# Altium PCB NANO PCB.PcbDoc
Units mm, origin at the board's own origin, x right, y up, seen from the top; angles counter-clockwise.
Board outline 45 x 18 mm, 2 copper layers (Top Layer, Bottom Layer); 28 components, 40 nets, 149 pads, 28 vias.
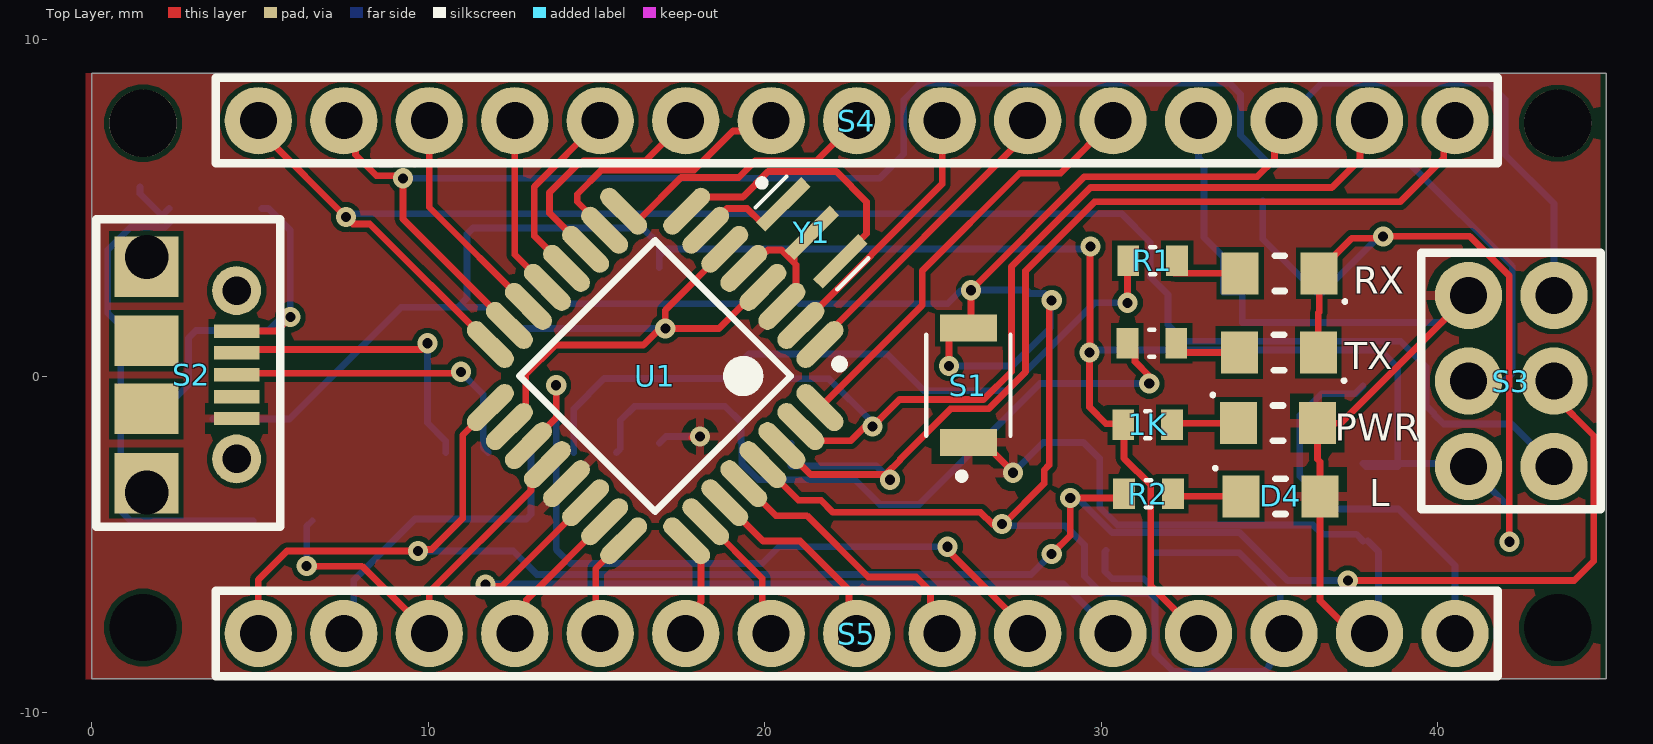
[diagram p0: Top Layer view]
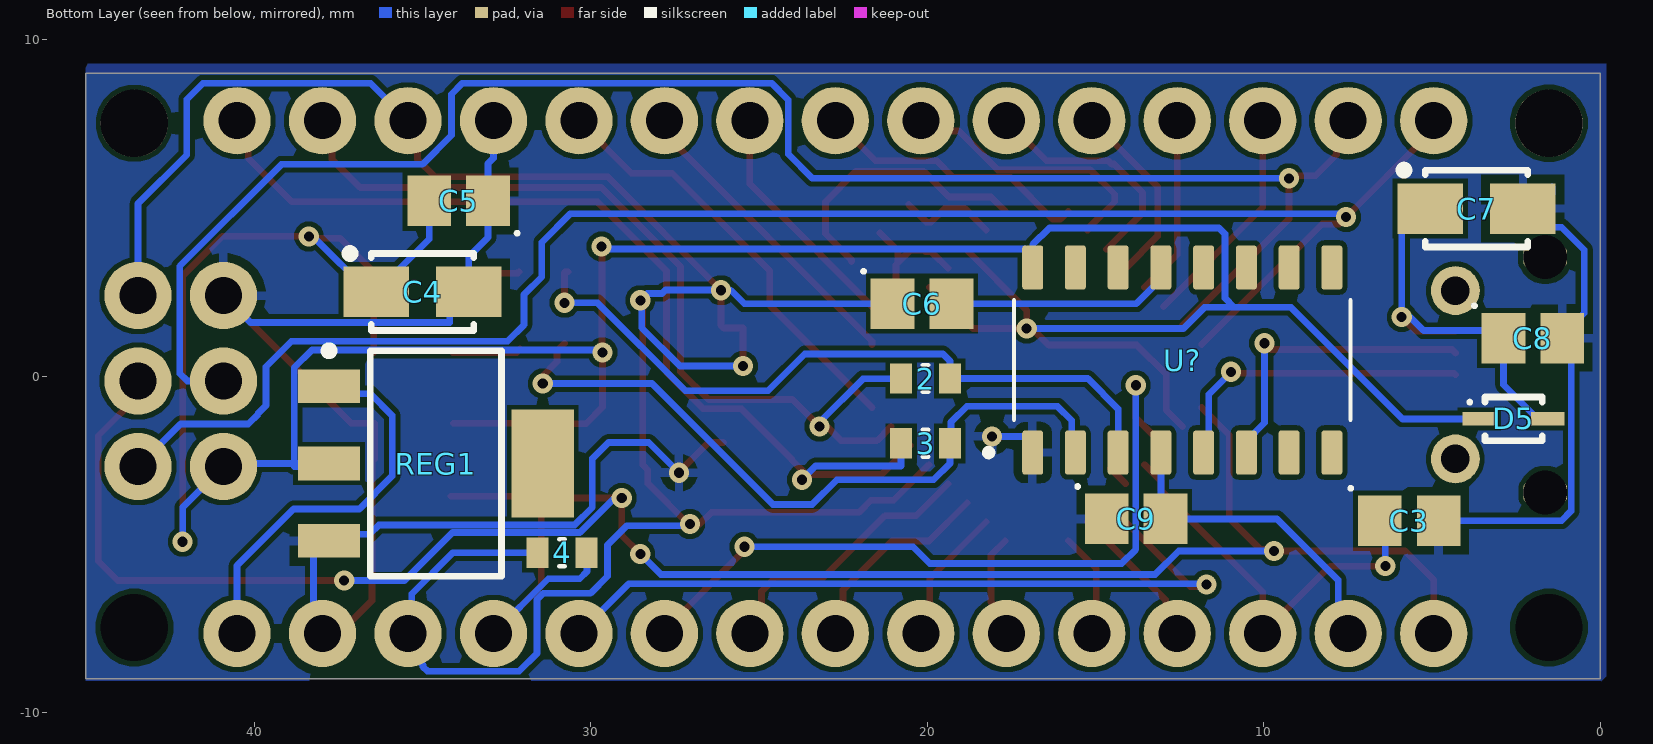
[diagram p1: Bottom Layer view, seen from below]

## Layer stack, top to bottom
Top Solder: solder mask 0.05, Solder Resist, Dk 3.5
Top Layer: signal copper 0.0356
Dielectric 1: dielectric 0.32, FR-4, Dk 4.8
Bottom Layer: signal copper 0.0356
Bottom Solder: solder mask 0.05, Solder Resist, Dk 3.5

## Board outline
0,-9 0,9 45,9 45,-9

## Design rules (kind name [scope] priority, off if disabled: settings)
Clearance [All] p1: gap=0.15 ignorepadtopadclearanceinfootprint=FALSE
HoleToHoleClearance [All] p1: gap=0 allowstackedmicrovias=TRUE
MinimumSolderMaskSliver [All] p1: minsoldermaskwidth=0
PolygonConnect [All] p1: connectstyle=Relief reliefconductorwidth=0.254 reliefentries=4 polygonreliefangle="90 Angle" airgapwidth=0.254
RoutingVias [All] p1: holewidth=0.6 width=1.27 viastyle="Through Hole" minholewidth=0.6 minwidth=1.27 maxholewidth=0.6 maxwidth=1.27
SilkToSilkClearance [All] p1: silktosilkclearance=0.1
SilkToSolderMaskClearance [IsPad] p1: minsilkscreentomaskgap=0 clearancetoexposedcopper=TRUE
SolderMaskExpansion [All] p1: expansion=0.05 istentingtop=FALSE
SupplyNets "Schematic Supply Nets_4" [InNet('+3V3')] p1: voltage=0.000
SupplyNets "Schematic Supply Nets_3" [InNet('VUSB')] p2: voltage=0.000
SupplyNets "Schematic Supply Nets_2" [InNet('VIN')] p3: voltage=0.000
SupplyNets "Schematic Supply Nets_1" [InNet('GND')] p4: voltage=0.000
SupplyNets "Schematic Supply Nets" [InNet('+5')] p5: voltage=0.000
Width Width_POW [(InNet('+3V3') AND InNet('+5') AND InNet('VIN') AND InNet('VUSB') AND InNet('GND'))] p1: maxlimit=0.6 minlimit=0.4 preferedwidth=0.4
Width [All] p2: maxlimit=0.3 minlimit=0.2 preferedwidth=0.2
26 further rules are at their usual default settings.

## Classes and differential pairs
component class Sheet1: 1K 2 3 4 C3 C4 C5 C6 C7 C8 C9 D5 R1 R2 REG1 rx S1 S2 S3 S4 S5 U1 Y1

## Components (designator, comment, footprint, x,y, rotation, side; value= is the part's Value field where it differs from the comment)
1K "ERA3AEB8870V" RES_ERA3AEB8870V 31.375,-1.45 r180 top
2 "1K" RES_ERA3AEB8870V 20.05,-0.075 r180 bottom
3 "1K" RES_ERA3AEB8870V 20.05,-2 r180 bottom
4 "1K" RES_ERA3AEB8870V 30.85,-5.25 r0 bottom
C3 "100nF Ceramic Multilayer Capacitor_1" CAPCP2012X09N 5.675,-4.3 r180 bottom
C4 "Capacitor SMT Tantalum" "CASE A - 3216X18" 34.996,2.497 r180 bottom value=4.7µF
C5 "100nF Ceramic Multilayer Capacitor_1" CAPCP2012X09N 33.923,5.206 r0 bottom
C6 "100nF Ceramic Multilayer Capacitor_1" CAPCP2012X09N 20.154,2.15 r180 bottom
C7 "Capacitor SMT Tantalum" "CASE A - 3216X18" 3.675,4.975 r180 bottom value=4.7µF
C8 "100nF Ceramic Multilayer Capacitor_1" CAPCP2012X09N 2,1.125 r180 bottom
C9 "100nF Ceramic Multilayer Capacitor_1" CAPCP2012X09N 13.792,-4.246 r180 bottom
D4 "L" LED1913X12NRED 35.325,-3.575 r0 top
D5 "Panasonic DB2J20900L Schottky Diode, 0.5A, 20V, 2.4ns, 2-Pin SMini2 F5 B" DIOM1712X07N 2.575,-1.275 r180 bottom
PWR "Kingbright Blue LED, 60 mcd 120 ° 0805" LED1913X12NBLUE 35.25,-1.4 r0 top (schematic designator D1)
R1 "1K" RES_ERA3AEB8870V 31.525,3.425 r0 top
R2 "1K" RES_ERA3AEB8870V 31.4,-3.5 r180 top
REG1 "LM1117MP-5.0/NOPB, Low Dropout Voltage Regulator, 1.5A, 5 V ±1%, 4-Pin SOT-223" SOT230P700X180-4N 34.6,-2.6 r180 bottom
RX "Kingbright Red LED, 100 mcd 120 ° 0805" LED1913X12NRED 35.3,3.05 r180 top (schematic designator D2)
S1 "B3U-1000P" SW_B3U-1000P 26.05,-0.275 r90 top
S2 "NewMolex Right Angle SMT Female Type B Micro USB Connector, 30 V ac, 1.8A" MicroUSB 4.303,1.267 r270 top
S3 "Programming Headers Dual Row" "ISP HEADER" 29.353,-20.343 r90 top
S4 "connector;str header;single row;.1 cont centers;.095 tail;gold or gtx;36 contact" Header 40.509,7.587 r180 top
S5 "connector;str header;single row;.1 cont centers;.095 tail;gold or gtx;36 contact" Header 40.509,-7.653 r180 top
TX "Kingbright Green LED, 70 mcd 120 ° 0805" LED1913X12NGREEN 35.275,0.7 r180 top (schematic designator D3)
U1 "ATMEGA328" TQFP80P900X900X120-32N 16.741,0 r225 top
U? "CH340C" SOIC127P600X180-16N 12.42,0.475 r90 bottom
Y1 "CSTCE16M3V53-R0" OSC_CSTCE16M3V53-R0 21.399,4.253 r315 top
? "ERA3AEB8870V" RES_ERA3AEB8870V 31.5,0.975 r180 top

## Footprints (in the part's own frame and the unit in brackets; to place one, negate y for a bottom-side part, rotate by r counter-clockwise, add the part's x,y. Pads: shape width x height; smd on the part's side, far side on the other; paste and mask are expansions set on the pad)
CAPCP2012X09N [mm] "Chip Capacitor, 2-Leads, Body 2.00x1.25mm, IPC Medium Density"
  rect 1.3x1.5 smd: 1(-0.875,0) 2(0.875,0)
  silkscreen extent -1.79,0.91 -1.69,1.01, body extent -1.05,-0.57 0.95,0.68, height 0.78
"CASE A - 3216X18" [mm] "Molded Capacitor, 2-Leads, Body 3.2x1.6mm, IPC Medium Density"
  rect 1.95x1.5 smd: 1(-1.375,0) 2(1.375,0)
  silkscreen extent -2.28,-1.14 1.52,1.27, body extent -1.52,-0.76 1.65,0.84, height 1.77
DIOM1712X07N [mm] "Molded Diode, 2-Leads, Body 1.70x1.25mm, IPC Medium Density"
  rect 1x0.4 smd: 1(-1.016,0) 2(1.016,0)
  silkscreen extent -1.35,-0.65 0.85,0.65, body extent -0.9,-0.45 0.9,0.45, height 0.8
Header [mm] "SIL Header"
  round 2 hole 1.1: 1(0,0) 2(2.54,0) 3(5.08,0) 4(7.62,0) 5(10.16,0) 6(12.7,0) 7(15.24,0) 8(17.78,0) 9(20.32,0) 10(22.86,0) 11(25.4,0) 12(27.94,0) 13(30.48,0) 14(33.02,0) 15(35.56,0)
  silkscreen extent -1.27,-1.27 36.83,1.27, body extent -1.33,-1.35 36.93,1.35, height 8.6
"ISP HEADER" [mm] "SIL Header for programming"
  round 2 hole 1.1: 1(17.653,-14.097) 2(17.653,-11.557) 3(20.193,-14.097) 4(20.193,-11.557) 5(22.733,-14.097) 6(22.733,-11.557)
  silkscreen extent 16.38,-15.49 24,-10.16, body extent 16.38,-15.37 24,-10.29, height 8
LED1913X12NBLUE [mm] "LED 2-Leads, Body 1.90x1.32mm, IPC Medium Density"
  rect 1.1x1.25 smd: 1(-1.175,0) 2(1.175,0)
  silkscreen extent -1.99,-0.52 0.15,0.89, body extent -1,-0.62 1.02,0.62, height 1.1
LED1913X12NGREEN [mm] "LED 2-Leads, Body 1.90x1.32mm, IPC Medium Density"
  rect 1.1x1.25 smd: 1(-1.175,0) 2(1.175,0)
  silkscreen extent -1.99,-0.53 0.15,0.89, body extent -1.01,-0.62 1.01,0.63, height 1.1
LED1913X12NRED [mm] "LED 2-Leads, Body 1.90x1.32mm, IPC Medium Density"
  rect 1.1x1.25 smd: 1(-1.175,0) 2(1.175,0)
  silkscreen extent -1.99,-0.52 0.15,0.89, body extent -1.02,-0.43 1.04,0.47, height 0.85
MicroUSB [mm] "MicroUSB  Molex 5Pin"
  rect 0.4x1.35 smd: 1(-0.07,0) 2(0.58,0) 3(1.23,0) 4(1.88,0) 5(2.53,0)
  rrect50% 0.6x1.3 hole 1.3: ""(-2.27,-2.667) ""(-2.27,-2.667) ""(4.73,-2.667)
  rect 1.8x1.9 smd: ""(-1.98,-2.678) ""(4.45,-2.678)
  round 1.45 hole 0.85: ""(-1.27,0) ""(3.73,0)
  rect 1.5x1.9 smd: ""(0.218,-2.678) ""(2.242,-2.678)
  silkscreen extent -3.39,-4.17 5.75,1.3, body extent -2.83,-5.32 5.37,0.11, height 2.68
OSC_CSTCE16M3V53-R0 [mm]
  rect 0.4x1.9 smd: 1(-1.2,0) 2(0,0) 3(1.2,0)
  silkscreen extent -2.2,-0.65 1.72,0.65, body extent -1.6,-0.65 1.6,0.65, height 1
RES_ERA3AEB8870V [mm]
  rect 0.65x0.9 smd: 1(-0.725,0) 2(0.725,0)
  silkscreen extent -0.08,-0.4 0.08,0.4
SOIC127P600X180-16N [mm]
  rrect25% 1.31x0.62 smd: 1(-2.75,4.445) 2(-2.75,3.175) 3(-2.75,1.905) 4(-2.75,0.635) 5(-2.75,-0.635) 6(-2.75,-1.905) 7(-2.75,-3.175) 8(-2.75,-4.445) 9(2.75,-4.445) 10(2.75,-3.175) 11(2.75,-1.905) 12(2.75,-0.635) 13(2.75,0.635) 14(2.75,1.905) 15(2.75,3.175) 16(2.75,4.445)
  silkscreen extent -2.85,-5 1.78,5.85, body extent -3,-5 3,5, height 1.8
SOT230P700X180-4N [mm] "SOT223, 4-Leads, Body 6.50x7.00mm (avg), Pitch 2.30mm, IPC Medium Density"
  rect 1.85x1 smd: 1(-3.175,2.3) 2(-3.175,0) 3(-3.175,-2.3)
  rect 1.85x3.2 smd: 4(3.175,0)
  silkscreen extent -3.3,-3.35 1.95,3.47, body extent -3.8,-3.12 3.29,3.38, height 1.65
SW_B3U-1000P [mm]
  rect 0.8x1.7 smd: 1(-1.7,0) 2(1.7,0)
  silkscreen extent -2.8,-1.25 1.5,1.25
TQFP80P900X900X120-32N [mm] "TQFP, 32-Leads, Body 7.00x7.00mm, Pitch 0.80mm, IPC Medium Density"
  oval 1.75x0.55 smd: 1(-4.125,2.8) 2(-4.125,2) 3(-4.125,1.2) 4(-4.125,0.4) 5(-4.125,-0.4) 6(-4.125,-1.2) 7(-4.125,-2) 8(-4.125,-2.8) 17(4.125,-2.8) 18(4.125,-2) 19(4.125,-1.2) 20(4.125,-0.4) 21(4.125,0.4) 22(4.125,1.2) 23(4.125,2) 24(4.125,2.8)
  oval 0.55x1.75 smd: 9(-2.8,-4.125) 10(-2,-4.125) 11(-1.2,-4.125) 12(-0.4,-4.125) 13(0.4,-4.125) 14(1.2,-4.125) 15(2,-4.125) 16(2.8,-4.125) 25(2.8,4.125) 26(2,4.125) 27(1.2,4.125) 28(0.4,4.125) 29(-0.4,4.125) 30(-1.2,4.125) 31(-2,4.125) 32(-2.8,4.125)
  silkscreen extent -4.25,-2.85 2.85,3.75, body extent -4.44,-4.5 4.56,4.5, height 1.6

## Part data
1K ?: Package=None, Availability=Unavailable, MP=ERA3AEB8870V, Price=None
2 3 4 R1 R2: library part ERA3AEB8870V, Package=None, Availability=Unavailable, MP=ERA3AEB8870V, Price=None
C3 C5 C6 C8 C9: "AVX 0805 Standard 100nF Ceramic Multilayer Capacitor, 50 V dc X7R Dielectric ±10% SMD", Capacitance=100nF, Manufacturer=AVX, Package=0805, Voltage=50V, Creator="Ritesh Kanjee", Datasheet URL=http://za.rs-online.com/web/p/ceramic-multilayer-capacitors/4646688/, Date Created="18 February 2015", RS Stock No.=464-6688
C4 C7: library part "4.7µF Tant RS 496-3545", "Capacitor,tantalum,SMT,16V,4.7uF,10%,A-case", Package=3216-18, Tolerance=10%, Voltage=16V, ComponentLink1Description="Supplier Website", ComponentLink1URL=http://za.rs-online.com/web/search/searchBrowseAction.html?method=getProduct&R=4963545, ComponentLink2Description="RS Data sheet", ComponentLink2URL=http://docs-europe.origin.electrocomponents.com/webdocs/04ed/0900766b804ed4cc.pdf, LatestRevisionDate=28-April-2010, Part Originator="H Theron", Publisher=DPSS, RS Stock Nr.=496-3545
D4: library part "Kingbright Red LED, 100 mcd 120 ° 0805", "Kingbright Red LED, 100 mcd 120 ° 0805", Color=RED, Forward Voltage=1.85V, Manufacturer=KingBright, Manufacturer Part No.=KP-2012SRC-PRV, Creator="Ritesh Kanjee", Datasheet URL=http://za.rs-online.com/web/p/visible-leds/4663813/, Date Created="18 February 2015", RS Stock No.=466-3813
D5: library part "Schottky Diode, 0.5A, 20V, 2.4ns, 2-Pin SMini2 F5 B", Manufacturer=Panasonic, Manufacturer Part No.=DB2J20900L, Maximum Continuous Forward Current=0.5A, Peak Reverse Repetitive Voltage=20V, Created By="R Kanjee", Datasheet=http://docs-europe.electrocomponents.com/webdocs/1398/0900766b813986b3.pdf, Date Created="1 March 2015", RS Stock No.=713-2703
PWR: Color=Blue, Forward Voltage=3.2V, Manufacturer=KingBright, Manufacturer Part No.=KP-2012PBC-A, Creator="Ritesh Kanjee", Datasheet URL=http://za.rs-online.com/web/p/visible-leds/4663784/, Date Created="18 February 2015", RS Stock No.=466-3784
REG1: library part LM1117MP-5.0, Manufacturer="Texas Instruments", Maximum Input Voltage=15V, Output Voltage=5V, Supply Current=1.5Amps, Created By="R Kanjee", Datasheet URL=http://za.rs-online.com/web/p/low-dropout-voltage-regulators/5339583/, Date Created="26 February 2015", RS Stock No.=533-9583
RX: Color=RED/RX, Forward Voltage=1.85V, Manufacturer=KingBright, Manufacturer Part No.=KP-2012SRC-PRV, Creator="Ritesh Kanjee", Datasheet URL=http://za.rs-online.com/web/p/visible-leds/4663813/, Date Created="18 February 2015", RS Stock No.=466-3813
S1: "Switch Tactile N.O. SPST Round Button Gull Wing 0.05A 12VDC 1.5N SMD Embossed T/R", Package=None, Availability=Unavailable, MP=B3U-1000P, Price=None
S2: library part "Micro USB Connector, 30 V ac, 1.8A", Manufacturer=Molex, Manufacturer Part No.=105017-0001, Max Current=1.8A, Max Voltage=30V, Creator="R Kanjee", Datasheet URL=http://za.rs-online.com/web/p/micro-usb-connectors/8486764/, Date Created="28 February 2015", RS Stock No=848-6764
S3: library part "Programming ISP, Programming Headers Dual Row", Current Rating="3Amps Continuous", Manufacturer=FCI, Manufacturer Part No.=68000-236HLF, Created By="R Kanjee", Date Created="1 March 2015", RS Stock No.=2509565626
S4 S5: library part "Single row; PCB headers", Current Rating="3Amps Continuous", Manufacturer=FCI, Manufacturer Part No.=68000-236HLF, Created By="R Kanjee", Date Created="1 March 2015", RS Stock No.=2509565626
TX: Color=Green/TX, Forward Voltage="2.1 V", Manufacturer=KingBright, Manufacturer Part No.=KP-2012MGC, Creator="Ritesh Kanjee", Datasheet URL=http://za.rs-online.com/web/p/visible-leds/4663778/, Date Created="18 February 2015", RS Stock No.=466-3778
U1: library part ATMEGA328P-AU, "ATMEGA328P-AU, 8 bit AVR Microcontroller 20MHz 1 kB, 32 kB Flash, 2 kB RAM, I2C 32-Pin TQFP", Company="Lumina Inova", Created By="Ritesh Kanjee", Datasheet URL=http://docs-europe.electrocomponents.com/webdocs/0db4/0900766b80db4deb.pdf, Date Created="14 February 2015", RS Stock No.=696-3092
U?: "USB to serial chip CH340", Package=None, Availability="Not in stock", Check_prices=https://www.snapeda.com/parts/CH340C/WCH/view-part/?ref=eda, MF=WCH, MP=CH340C, Price=None, SnapEDA_Link=https://www.snapeda.com/parts/CH340C/WCH/view-part/?ref=snap
Y1: "Resonators RECOMMENDED ALT 81-CSTNE16M3V530000R", Package="SMD-3 Murata", Check_prices=https://www.snapeda.com/parts/CSTCE16M3V53-R0/Murata/view-part/?ref=eda, MF=Murata, MP=CSTCE16M3V53-R0, SnapEDA_Link=https://www.snapeda.com/parts/CSTCE16M3V53-R0/Murata/view-part/?ref=snap

## Free pads (board coordinates)
  round 1.524 hole 2: ""(1.524,-7.476) ""(43.561,-7.476)
  round 2 hole 2: ""(1.524,7.51) ""(43.561,7.51)

## Via types
v1: diameter 0.6, hole 0.3, Top Layer to Bottom Layer, 28 vias

## Nets (pads, with @x,y where several pads share a name; then routed paths per layer and width w, separated by ;. In a path a pad name is that pad's centre, name@x,y a point inside that pad or via, vN(x,y) a via of type N, cw(c..) or ccw(c..) an arc to the next point about the centre after c; other vN are vias at no path point)
+3V3: C9.2 S5.14 U?.4 | length 9.6
  Bottom Layer w0.2: S5.14 7.787,-7.355 7.787,-6.063 9.604,-4.246 C9.2 13.055,-4.108 U?.4
+5: 1K.2 4.1 C4.1 C5.2 D5.1 REG1.2 RX.1 S3.2 S5.4 TX.1 U1.4 U1.6 U1.18 U?.16 | length 109.6
  Top Layer w0.2: U1.18 12.893,-1.019 12.893,0.043 13.775,0.925 16.391,0.925 16.88,1.414 v1(17.043,1.414) ; U1.6 18.809,3.724 17.043,1.958 v1(17.043,1.414) ; U1.4 19.861,2.634 18.641,1.414 v1(17.043,1.414) ; v1(29.675,3.85) 29.663,3.838 29.663,0.713 v1(29.65,0.7) 29.65,-0.925 30.142,-1.417 30.617,-1.417 1K.2 ; 1K.2@30.675,-1.4 30.675,-2.447 31.471,-3.242 31.471,-6.234 S5.4 ; TX.1 36.45,1.871 36.475,1.896 36.475,3.125 37.44,4.09 38.315,4.09 v1(38.375,4.15) 40.952,4.15 42.125,2.977 v1(42.125,-4.925)
  Bottom Layer w0.2: D5.1 5.875,-1.275 9.192,2.042 10.879,2.042 ; U?.16 U?.16@16.865,3.541 ; v1(17.043,1.414) 12.385,1.414 11.757,2.042 10.879,2.042 ; v1(29.65,0.7) 29.725,0.775 38.282,0.775 38.811,0.246 38.811,-2.6 ; v1(29.675,3.85) 29.601,3.776 17.075,3.776 16.865,3.566 U?.16@16.865,3.541 ; 4.1@30.15,-5.175 30.108,-5.217 30.108,-5.808 30.325,-6.025 31.261,-6.025 S5.4 ; C5.2 34.798,4.07 C4.1 36.596,2.497 38.249,4.15 v1(38.375,4.15) ; 38.811,-2.69 37.865,-2.69 REG1.2 38.811,-2.6 ; v1(42.125,-4.925) 42.125,-3.905 S3.2 40.488,-2.69 40.488,-2.6 38.811,-2.6 ; 10.879,2.042 11.15,2.313 11.15,4.225 11.325,4.4 16.368,4.4 16.865,3.903 U?.16@16.865,3.541
A0: S5.12 U1.23 | length 4.4
  Top Layer w0.2: S5.12 12.914,-7.309 12.914,-6.655 U1.23
A1: S5.11 U1.24 | length 3.2
  Top Layer w0.2: S5.11 14.975,-7.519 14.975,-5.726 U1.24
A2: S5.10 U1.25 | length 3.1
  Top Layer w0.2: S5.10 17.649,-7.166 18.102,-6.713 18.102,-5.321 U1.25
A3: S5.9 U1.26 | length 4.1
  Top Layer w0.2: U1.26 19.925,-6.012 19.925,-7.389 S5.9
A4/SDA: S5.8 U1.27 | length 6.2
  Top Layer w0.2: U1.27 19.944,-4.9 21.05,-4.9 22.503,-6.353 22.503,-7.427 S5.8
A5/SCL: S5.7 U1.28 | length 8.3
  Top Layer w0.2: U1.28 20.326,-4.15 21.25,-4.15 23.075,-5.975 24.5,-5.975 24.925,-6.4 24.925,-7.309 S5.7
A6: S5.6 U1.19 | length 22.6
  Top Layer w0.2: U1.19 13.8,-1.244 v1(13.8,-0.275) ; v1(25.425,-5.075) 25.425,-5.172 27.809,-7.556 S5.6
  Bottom Layer w0.2: v1(13.8,-0.275) 13.8,-5.15 14.221,-5.571 19.923,-5.571 20.369,-5.125 20.419,-5.075 v1(25.425,-5.075)
A7: S5.5 U1.22 | length 23.3
  Top Layer w0.2: v1(11.7,-6.2) 11.755,-6.255 12.183,-6.255 12.442,-5.995 U1.22
  Bottom Layer w0.2: v1(11.7,-6.2) 11.725,-6.175 28.871,-6.175 S5.5
AREF: C3.1 S5.13 U1.20 | length 12.2
  Top Layer w0.2: v1(6.386,-5.65) 8.026,-5.65 9.706,-7.329 S5.13@10.029,-7.329 ; S5.13 S5.13@10.029,-7.329 ; U1.20 13.05,-3.125 13.05,-3.4 10.029,-6.421 S5.13@10.029,-7.329
  Bottom Layer w0.2: v1(6.386,-5.65) 6.386,-4.464 C3.1
D0/RX: 3.1 S4.1 U1.30 | length 32.7
  Top Layer w0.2: U1.30 21.363,-2.925 ; 23.077,-2.924 22.777,-2.924 22.775,-2.925 21.363,-2.925 ; v1(23.724,-3.082) v1@23.567,-2.925 ; S4.1 40.179,7.257 40.179,6.479 38.875,5.175 29.8,5.175 27.75,3.125 27.75,0.125 26.65,-0.975 25.517,-0.975 24.028,-2.464 24.028,-2.488 23.591,-2.925 v1@23.567,-2.925 ; 21.363,-2.925 22.777,-2.925 23.077,-2.925 v1@23.567,-2.925
  Bottom Layer w0.2: 3.1 20.775,-2.675 23.317,-2.675 v1(23.724,-3.082)
D1/TX: 2.1 S4.2 U1.31 | length 26.4
  Top Layer w0.2: U1.31 21.496,-1.927 22.548,-1.927 22.974,-1.5 v1(23.2,-1.5) 24,-0.7 26.5,-0.7 27.327,0.127 27.327,3.252 29.675,5.6 36.85,5.6 37.684,6.434 37.684,7.302 S4.2
  Bottom Layer w0.2: 2.1 20.785,-0.085 21.91,-0.085 23.2,-1.375 v1(23.2,-1.5)
D2: S4.5 U1.32 | length 12.8
  Top Layer w0.2: U1.32 24.675,2.101 24.675,3.125 27.575,6.025 28.787,6.025 S4.5@30.349,7.587
D3: S4.6 U1.1 | length 9.2
  Top Layer w0.2: U1.1 21.638,1.032 27.809,7.203 S4.6
D4: S4.7 U1.2 | length 7.8
  Top Layer w0.2: U1.2 25.269,5.7 S4.7
D5: S4.8 U1.9 | length 8.2
  Top Layer w0.2: U1.9 16.043,4.658 16.272,4.658 17.514,5.9 19.225,5.9 19.725,6.4 21.542,6.4 S4.8
D6: S4.9 U1.10 | length 8.1
  Top Layer w0.2: U1.10 15.238,4.366 14.425,5.18 14.425,5.4 15.15,6.125 17.9,6.125 19.056,7.281 19.884,7.281 S4.9
D7: S4.10 U1.11 | length 7.1
  Top Layer w0.2: U1.11 13.6,4.838 13.6,5.45 14.45,6.3 14.525,6.3 14.625,6.4 16.462,6.4 S4.10
D8: S4.11 U1.12 | length 5.6
  Top Layer w0.2: U1.12 13.15,4.157 13.15,5.628 S4.11
D9: S4.12 U1.13 | length 5.4
  Top Layer w0.2: S4.12 12.569,3.606 U1.13
D10: S4.13 U1.14 | length 6.7
  Top Layer w0.2: S4.13 10.029,5.015 U1.14
D11/MOSI: S3.4 S4.14 U1.15 | length 51.2
  Top Layer w0.2: S4.14 7.834,7.243 7.834,6.574 8.456,5.952 9.173,5.952 v1(9.25,5.875) 9.25,4.663 U1.15
  Bottom Layer w0.2: v1(9.25,5.875) 23.409,5.875 24.13,6.596 24.13,8.205 24.629,8.704 33.807,8.704 34.138,8.374 34.138,7.154 35.001,6.291 39.184,6.291 42.21,3.265 42.21,0.074 41.986,-0.15 S3.4
D12/MISO: S3.1 S4.15 U1.16 | length 50.7
  Top Layer w0.2: S4.15 4.949,7.326 7.755,4.52 8.261,4.52 U1.16
  Bottom Layer w0.2: v1(7.55,4.725) 7.65,4.825 30.6,4.825 31.45,3.975 31.45,2.95 31.979,2.421 31.979,1.521 32.467,1.033 38.892,1.033 39.65,0.275 39.65,-0.875 39.875,-1.1 39.875,-1.124 40.176,-1.425 42.185,-1.425 S3.1
D13/SCK: R2.2 S3.3 S5.15 U1.17 | length 57.7
  Top Layer w0.2: S5.15 4.949,-6.051 5.8,-5.2 v1(9.695,-5.2) 9.739,-5.156 10.099,-5.156 11.02,-4.236 11.02,-1.761 U1.17 ; v1(28.524,-5.292) 29.075,-4.741 v1(29.075,-3.625) 30.665,-3.625 30.675,-3.615 R2.2 ; v1(37.325,-6.075) 44.055,-6.075 44.633,-5.497 44.633,-1.775 43.45,-0.592 S3.3
  Bottom Layer w0.2: v1(9.695,-5.2) 12.525,-5.2 13.225,-5.9 27.916,-5.9 v1(28.524,-5.292) ; v1(29.075,-3.625) 29.296,-3.625 30.321,-4.65 34.106,-4.65 35.531,-6.075 v1(37.325,-6.075)
GND: C3.2 C4.2 C5.1 C7.2 C8.2 C9.1 D4.2 PWR.2 REG1.3 S1.1 S2.5 S3.6 S4.4 S5.2 U1.3 U1.5 U1.21 U?.1 Y1.2 | length 69.5
  Top Layer w0.2: U1.21 U1.21@14.558,-2.749 ; v1@17.828,-1.832 17.86,-1.8 v1(18.075,-1.8) ; U1.5 19.866,3.691 20.041,3.691 20.091,3.741 20.494,3.741 20.93,3.306 ; U1.3 20.506,2.278 20.93,2.278 20.93,3.306 ; Y1.2 20.868,3.722 20.868,3.367 20.93,3.306 ; S1.1 26.5,-1.975 27.375,-2.85 v1(27.375,-2.875) ; S5.2 37.482,-7.653 37.009,-7.179 37.004,-7.179 36.5,-6.675 D4.2 36.5,-2.548 36.425,-2.473 PWR.2 37.12,-1.4 S3.6
  Bottom Layer w0.2: C7.2@1.434,5.616 1.434,5.416 C7.2@2.088,4.762 ; C7.2 C7.2@2.088,4.762 ; C3.2 1.15,-4.3 0.864,-4.014 C8.2@0.864,1.125 ; U?.1@16.865,-1.996 17.061,-1.8 v1(18.075,-1.8) ; v1@27.243,-2.875 v1(27.375,-2.875) 28.275,-1.975 29.473,-1.975 29.95,-2.452 29.95,-3.9 30.475,-4.425 36.296,-4.425 36.571,-4.7 37.575,-4.7 REG1.3 ; S4.4 32.889,6.475 33.048,6.316 C5.1 33.048,4.12 33.621,3.548 C4.2 34.188,2.497 34.188,1.592 40.112,1.592 S3.6 ; REG1.3@37.921,-4.9 38.237,-5.215 38.237,-7.386 S5.2 ; C8.2@0.864,1.125 C8.2@0.864,1.386 ; C8.2@0.864,1.125 C8.2 ; C8.2@0.864,1.386 0.812,1.438 0.812,1.538 0.475,1.875 0.475,3.75 1.142,4.417 C7.2@1.742,4.417 ; C8.2@0.864,1.386 C8.2 ; C8.2@0.864,1.386 0.864,1.49 1.125,1.49 C8.2 ; C7.2@1.742,4.417 2.167,4.417 2.3,4.55 C7.2@2.088,4.762 ; C7.2@1.742,4.417 C7.2@2.088,4.762
Net1K_1: 1K.1 PWR.1 | length 2
  Top Layer w0.2: 1K.1@32.125,-1.4 PWR.1
Net_1: ?.1 TX.2 | length 2
  Top Layer w0.2: ?.1@32.1,0.8 32.2,0.7 TX.2
NetC6_2: C6.2 U?.13 | length 6.9
  Bottom Layer w0.2: U?.13 13.055,2.88 13.785,2.15 C6.2
NetD4_1: D4.1 R2.1 | length 2.1
  Top Layer w0.2: R2.1 32.2,-3.575 D4.1
NetR1_2: R1.2 RX.2 | length 2
  Top Layer w0.2: R1.2@32.125,3.1 32.175,3.05 RX.2
NetS2_2: S2.2 U?.6 | length 9.3
  Top Layer w0.2: S2.2 4.403,0.787 9.787,0.787 v1(9.975,0.975)
  Bottom Layer w0.2: v1(9.975,0.975) 9.975,-1.39 10.515,-1.93 U?.6
NetS2_3: S2.3 U?.5 | length 9.4
  Top Layer w0.2: S2.3 4.347,0.081 10.931,0.081 v1(10.975,0.125)
  Bottom Layer w0.2: v1(10.975,0.125) 10.975,0.113 11.63,-0.542 11.63,-2.12 U?.5
RST: 4.2 C6.1 S1.2 S3.5 S4.3 S5.3 U1.29 | length 73.9
  Top Layer w0.2: U1.29 20.998,-3.691 21.666,-3.691 22.025,-4.05 26.41,-4.05 26.76,-4.4 v1(27.05,-4.4) 27.1,-4.4 28.3,-3.2 28.3,-2.8 28.45,-2.65 28.45,2.175 v1(28.525,2.25) ; v1(25.476,0.296) 25.476,1.425 S1.2 26.125,1.5 v1(26.125,2.55) 29.5,5.925 34.633,5.925 35.143,6.435 35.143,7.301 S4.3 ; S5.3 S5.3@35.6,-7.482
  Bottom Layer w0.2: C6.1 25.435,2.15 25.835,2.55 v1(26.125,2.55) 26.132,2.557 27.778,2.557 27.881,2.455 28.32,2.455 v1(28.525,2.25) 28.482,2.207 28.482,1.432 27.346,0.296 v1(25.476,0.296) ; v1@27.053,-4.397 27.103,-4.447 28.467,-4.447 28.922,-4.447 29.5,-5.025 29.5,-5.95 30.009,-6.459 31.413,-6.459 31.598,-6.644 31.598,-8.248 32.121,-8.771 34.854,-8.771 34.981,-8.644 34.981,-8.588 35.429,-8.14 S5.3 ; 4.2@31.6,-5.25 34.093,-5.25 35.313,-6.47 35.313,-7.537 S5.3 ; S5.3@35.429,-7.577 S5.3 ; S4.3 36.542,8.7 41.525,8.7 42,8.225 42,6.575 43.45,5.125 S3.5
RX: 3.2 ?.2 U?.2 | length 21.8
  Top Layer w0.2: ?.2 31,0.75 31,0.427 31.425,0.002 v1(31.425,-0.225)
  Bottom Layer w0.2: U?.2 15.705,-2.165 15.705,-1.32 16.125,-0.9 18.825,-0.9 19.292,-1.367 19.292,-1.967 3.2 19.325,-2.599 19.808,-3.082 22.682,-3.082 23.419,-3.818 24.587,-3.818 28.181,-0.225 v1(31.425,-0.225)
TX: 2.2 R1.1 U?.3 | length 21.3
  Top Layer w0.2: R1.1@30.675,3.1 30.75,3.1 30.775,3.075 v1(30.775,2.175)
  Bottom Layer w0.2: U?.3 14.325,-0.975 15.225,-0.075 2.2 19.325,0.449 19.528,0.652 23.639,0.652 24.73,-0.439 27.186,-0.439 29.8,2.175 v1(30.775,2.175)
VIN: REG1.1 S5.1 | length 11.8
  Bottom Layer w0.2: REG1.1 37.55,-0.525 36.55,-0.525 35.9,-1.175 35.9,-2.975 36.875,-3.95 38.825,-3.95 40.509,-5.634 S5.1
VUSB: C7.1 C8.1 D5.2 S2.1 | length 11.9
  Top Layer w0.2: S2.1 5.487,1.337 v1(5.9,1.75)
  Bottom Layer w0.2: D5.2 1.659,-1.175 1.959,-1.175 2.875,-0.259 C8.1 ; C8.1 3.1,1.35 5.248,1.35 5.648,1.75 v1(5.9,1.75) 5.9,4.325 5.25,4.975 C7.1
XTAL1: U1.7 Y1.1 | length 3
  Top Layer w0.2: U1.7 18.244,4.344 18.875,4.975 19.474,4.975 19.878,4.571 20.02,4.571 Y1.1
XTAL2: U1.8 Y1.3 | length 8.3
  Top Layer w0.2: U1.8 18.102,5.321 19.346,5.321 20.1,6.075 22.125,6.075 23.025,5.175 23.025,4.228 22.247,3.451 Y1.3
pads on no net: REG1.4 S2. S2.4 U?.7 U?.8 U?.9 U?.10 U?.11 U?.12 U?.14 U?.15

## Polygon pours and split planes (outlines as drawn)
GND on Bottom Layer "GND_L02_P002" (solid, pour order 2): -0.05,-9.075 -0.175,-8.95 -0.175,9.275 45.125,9.275 45,9.15 45,-9.05
GND on Top Layer "GND_L01_P000" (solid, pour order 0): -0.174,-9.006 44.801,-9.006 44.826,-8.981 44.826,8.994 -0.174,8.994

## Silkscreen, mask and mechanical layers (free items; w line width, h text height)
Mechanical 1:
  lines w0.254: 0.025,-9.075 45.025,-9.075 45.025,8.925 0.025,8.925 0.025,-9.075